# Altium PCB TS1A(EE19)9-7.PcbDoc
Units mm, origin at the board's own origin, x right, y up, seen from the top; angles counter-clockwise.
Board outline 57.72 x 30.96 mm, 2 copper layers (Top Layer, Bottom Layer); 33 components, 19 nets, 72 pads, 7 vias.
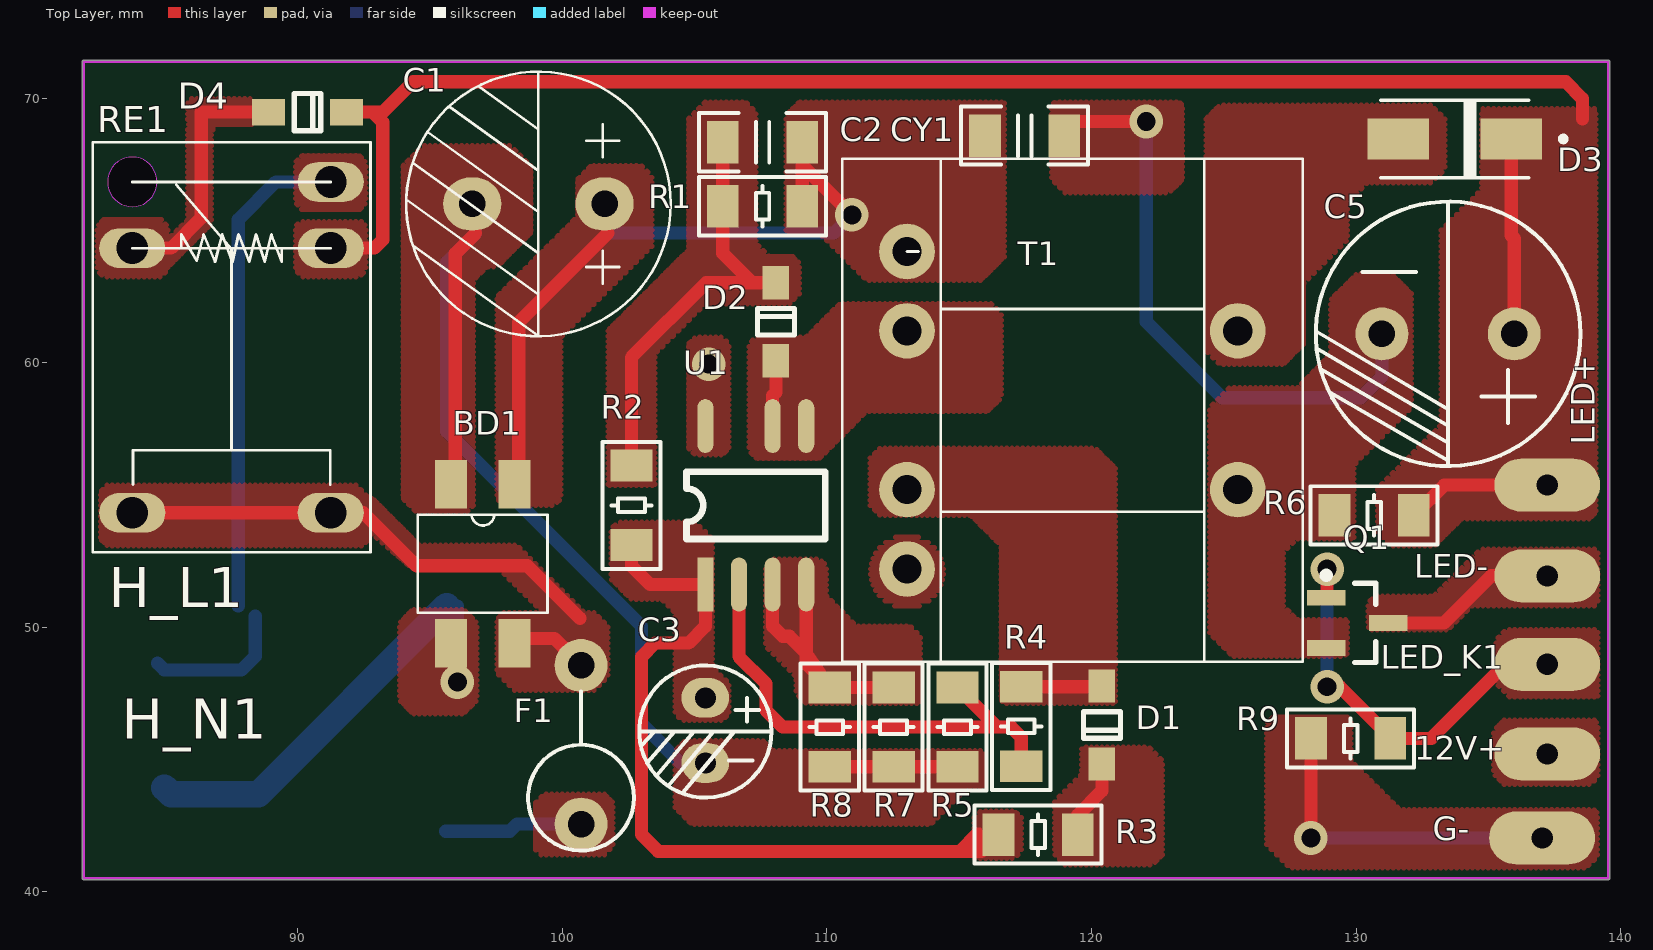
[diagram p0: Top Layer view]
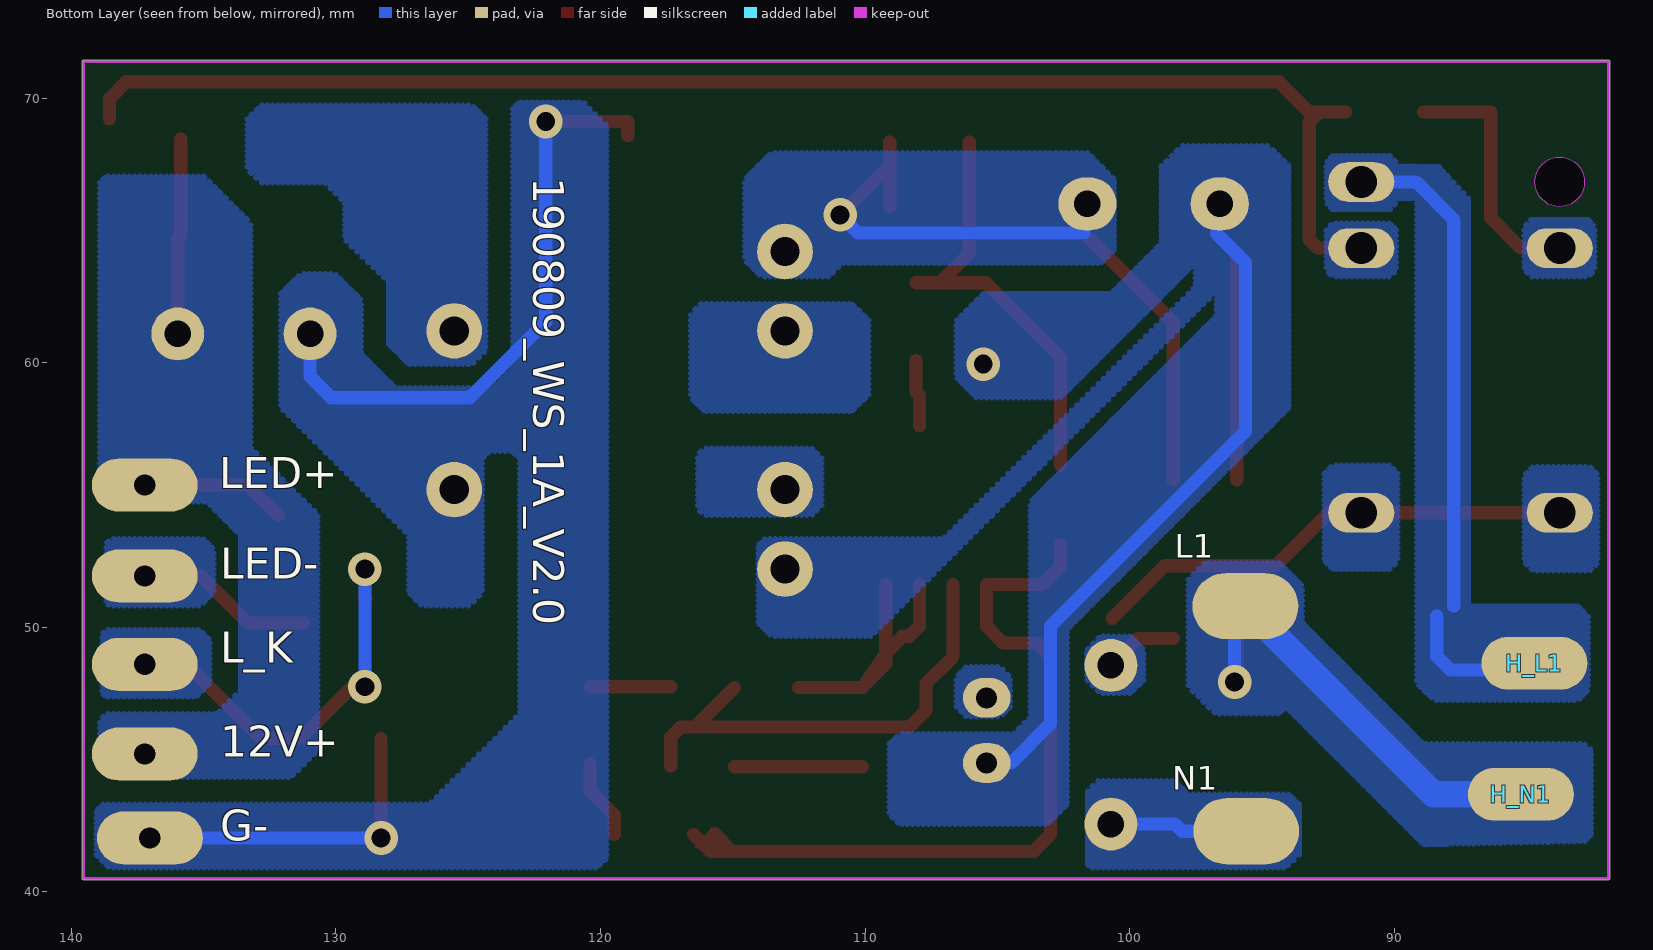
[diagram p1: Bottom Layer view, seen from below]

## Layer stack, top to bottom
Top Solder: solder mask 0.0102, Solder Resist, Dk 3.5
Top Layer: signal copper 0.0356
Dielectric 1: dielectric 0.32, FR-4, Dk 4.8
Bottom Layer: signal copper 0.0356
Bottom Solder: solder mask 0.0102, Solder Resist, Dk 3.5

## Board outline
81.865,40.513 ccw(c81.915,40.513) 81.915,40.463 139.533,40.463 ccw(c139.533,40.513) 139.583,40.513 139.583,71.374 ccw(c139.533,71.374) 139.533,71.424 81.915,71.424 ccw(c81.915,71.374) 81.865,71.374

## Design rules (kind name [scope] priority, off if disabled: settings)
Clearance [All] p1: gap=0.254 ignorepadtopadclearanceinfootprint=FALSE except(0: Arc-Hole Track-Hole SMDPad-Hole THPad-Hole Via-Hole Fill-Hole Poly-Hole Region-Hole Text-Hole)
PolygonConnect [All] p1: connectstyle=Direct reliefconductorwidth=0.254 reliefentries=4 polygonreliefangle="90 Angle" airgapwidth=0.254
RoutingVias [All] p1: holewidth=0.711 width=1.27 viastyle="Through Hole" minholewidth=0.711 minwidth=1.27 maxholewidth=0.711 maxwidth=1.27
SolderMaskExpansion [All] p1: expansion=0.102
Width [All] p1: maxlimit=1 minlimit=0.5 preferedwidth=0.5
30 further rules are at their usual default settings.

## Components (designator, comment, footprint, x,y, rotation, side; value= is the part's Value field where it differs from the comment)
12V+ "NC" PAD#1 136.826,45.212 r180 top
BD1 "MB10S/SOP-4" MBL10S 97,52.4 r180 top
C1 "10uF/400V" "400V/10uF 直插电解电容" 101.6,66 r180 top value=?
C2 "1nF/1206/1kV/10%" C1206 107.569,68.326 r0 top value=?
C3 "10uF/50V" 50V/10uF 105.41,46.101 r0 top value=?
C5 "1000uF/16V" 16V/1000uF 133.477,61.087 r180 top value=?
CY1 "1nF/1206/1kV/10%" C1206 117.475,68.58 r0 top value=?
D1 "FR107/SOD-123" SOD123 120.396,47.781 r90 top
D2 "FR107/SOD-123" SOD123 108.077,60.071 r270 top
D3 "SS310/SMA" SMA 133.731,68.453 r180 top
D4 "FR107" SOD123 88.9,69.469 r180 top
F1 "保险丝3A/250V" FUSE 100.711,46.061 r90 top
G- "NC" PAD#1 136.633,42.037 r180 top
H_L1 "Welding-hole" PAD#2 84.709,48.641 r180 top
H_N1 "Welding-hole" PAD#2 85.217,43.688 r180 top
L1 "NC" PAD#3 95.631,50.8 r0 bottom
LED+ "NC" PAD#1 136.826,55.372 r180 bottom
LED- "NC" PAD#1 136.826,51.943 r180 bottom
LED_K1 "NC" PAD#4 136.826,48.6 r0 top
N1 "NC" PAD#3 95.6,42.291 r180 bottom
Q1 "AO3400" SOT_23_N-MOS 130.048,50.165 r270 top
R1 "120K/1206/5%" R1206 107.569,65.913 r0 top value=1K
R2 "6.8M/1206/5%" R1206 102.616,54.61 r90 top value=1K
R3 "10R/1206/5%" R1206 117.983,42.164 r0 top value=1K
R4 "20K/1206/1%" R1206 117.348,46.252 r90 top value=1K
R5 "2.1K/1206/1%" R1206 114.935,46.228 r90 top value=1K
R6 "5.1K/1206/5%" R1206 130.683,54.229 r0 top value=1K
R7 "1.8R/1206/5%" R1206 112.522,46.228 r270 top value=1K
R8 "1.8R/1206/5%" R1206 110.109,46.228 r270 top value=1K
R9 "10K/1206/5%" R1206 129.794,45.8 r180 top value=1K
RE1 "RELAY-BSZ6-SS-112L" HKE_HRS1_DC12v 87.503,60.579 r90 top locked
T1 "TRANS" TRANS(EE19) 113.03,64.2 r0 top
U1 "LY2337/SOP-7" SOP-7 107.315,54.61 r90 top

## Footprints (in the part's own frame and the unit in brackets; to place one, negate y for a bottom-side part, rotate by r counter-clockwise, add the part's x,y. Pads: shape width x height; smd on the part's side, far side on the other; paste and mask are expansions set on the pad)
16V/1000uF [mm]
  round 2 hole 1: 1(-2.5,0) 2(2.5,0)
  silkscreen extent -5,-5 5,5
50V/10uF [mm]
  oval 1.8x1.5 hole 0.8: 1(0,1.232) 2(0,-1.232)
  silkscreen extent -2.5,-2.54 2.5,2.46
"400V/10uF 直插电解电容" [mm]
  oval 2.2x2 hole 1: 1(0,0) 2(5,0)
  silkscreen extent -2.5,-5 7.5,5
C1206 [mm]
  rect 1.2x1.6 smd: 1(-1.5,0) 2(1.5,0)
  silkscreen extent -2.4,-1.1 2.4,1.1
FUSE [mm]
  round 2 hole 1: 1(-3.5,0) 2(2.5,0)
  silkscreen extent -4.5,-2 1.51,2
HKE_HRS1_DC12v [mm]
  oval 1.5x2.5 hole 1.2: 1(-6.25,-3.75) 2(3.75,-3.75) 3(6.25,-3.75) 5(3.75,3.75) 6(-6.25,3.75)
  Keep-Out Layer board cut-out: 5.314,3.747 5.386,3.389 5.588,3.085 5.892,2.882 6.25,2.811 6.25,2.811 6.608,2.882 6.912,3.085 7.114,3.389 7.186,3.747 7.186,3.747 7.114,4.105 6.912,4.408 6.608,4.611 6.25,4.682 6.25,4.682 5.892,4.611 5.588,4.408 5.386,4.105 5.314,3.747
  silkscreen extent -7.75,-5.25 7.75,5.25
MBL10S [mm]
  rect 1.2x1.84 smd: 1(-1.2,-3) 2(-1.2,3) 3(1.2,-3) 4(1.2,3)
  silkscreen extent -2.44,-1.85 2.46,1.85
PAD#1 [mm]
  oval 4x2 hole 0.8: 1(-0.4,0)
PAD#2 [mm]
  oval 4x2 smd far side: 1(0,0)
PAD#3 [mm]
  oval 4x2.5 smd: 1(0,0)
PAD#4 [mm]
  oval 4x2 hole 0.8: 1(0.4,0)
R1206 [mm]
  rect 1.2x1.6 smd: 1(-1.5,0) 2(1.5,0)
  silkscreen extent -2.4,-1.1 2.4,1.1
SMA [mm]
  rect 2.33x1.55 smd: 1(2.135,0) 2(-2.135,0)
  silkscreen extent -4.2,-1.5 2.8,1.46
SOD123 [mm]
  rect 1.25x1 smd: 1(0,0) 2(-2.95,0)
  silkscreen extent -1.97,-0.7 -0.97,0.7, body extent -3.37,-0.85 0.38,0.85, height 1.2
SOP-7 [mil]
  rect 80x24 smd: 1(-117.87,75)
  oval 80x24 smd: 2(-117.87,25) 3(-117.87,-25) 4(-117.87,-75) 5(117.87,-75) 6(117.87,-25) 7(117.87,75)
  silkscreen extent -50,-103 50,103, body extent -118,-96 118,96, height 67
SOT_23_N-MOS [mm]
  rect 0.6x1.45 smd: 1(0,1.175) 2(-0.95,-1.175) 3(0.95,-1.175)
  silkscreen extent -1.92,-1.3 1.5,0.7, body extent -1.5,-0.7 1.5,0.7, height 1.1
TRANS(EE19) [mm]
  round 2.1 hole 1.1: 1(0,0) 2(0,-3) 3(0,-9) 4(0,-12) 5(12.5,-9) 6(12.5,-3)
  silkscreen extent -2.45,-15.5 14.95,3.5

## Part data
12V+ G- L1 LED+ LED- LED_K1 N1: library part Welding-hole, "焊接点"
BD1: library part Bridge2, "整流桥 MB10S/SOP-4", LatestRevisionDate=17-Jul-2002, LatestRevisionNote="Re-released for DXP Platform.", PackageDescription="Bridge Rectifier; 4 Terminals; Body 16.8 x 16.8 mm (typ); Pitch 10.67 mm", PackageReference=D-46_6A, Published=24-Mar-1999, Publisher="Altium Limited"
C1: library part "Cap Pol1", "直插电解电容10uF/400V", LatestRevisionDate=17-Jul-2002, LatestRevisionNote="Re-released for DXP Platform.", PackageDescription="Polarized Capacitor (Radial); 2 Leads", PackageReference=RB7.6-15, Published=8-Jun-2000, Publisher="Altium Limited"
C2 CY1: library part Cap, "1nF/1206/50V/10%", LatestRevisionDate=17-Jul-2002, LatestRevisionNote="Re-released for DXP Platform.", PackageDescription="Radial Cap, Thru-Hole; 2 Leads; 0.3 in Pin Spacing", PackageReference=RAD-0.3, Published=8-Jun-2000, Publisher="Altium Limited"
C3: library part "Cap Pol1", "直插电解电容10uF/50V", LatestRevisionDate=17-Jul-2002, LatestRevisionNote="Re-released for DXP Platform.", PackageDescription="Polarized Capacitor (Radial); 2 Leads", PackageReference=RB7.6-15, Published=8-Jun-2000, Publisher="Altium Limited"
C5: library part "Cap Pol1", "直插电解电容1000uF/16V", LatestRevisionDate=17-Jul-2002, LatestRevisionNote="Re-released for DXP Platform.", PackageDescription="Polarized Capacitor (Radial); 2 Leads", PackageReference=RB7.6-15, Published=8-Jun-2000, Publisher="Altium Limited"
D1 D2: library part Diode, "快恢复二极管 FR107 封装SOD-123", Code_JEDEC=DO-214-AB, LatestRevisionDate=17-Jul-2002, LatestRevisionNote="Re-released for DXP Platform.", PackageDescription="DO-214-AB/SMC; 2 C-Bend Leads; Body 7.9 x 5.9 mm, inc. leads (LxW)", PackageReference=SMC, PackageVersion=Sep-1996, Published=8-Jun-2000, Publisher="Altium Limited"
D3: library part Diode, "肖特基二极管 SS310/封装 SMA", Code_JEDEC=DO-214-AB, LatestRevisionDate=17-Jul-2002, LatestRevisionNote="Re-released for DXP Platform.", PackageDescription="DO-214-AB/SMC; 2 C-Bend Leads; Body 7.9 x 5.9 mm, inc. leads (LxW)", PackageReference=SMC, PackageVersion=Sep-1996, Published=8-Jun-2000, Publisher="Altium Limited"
D4: library part Diode, "Default Diode", Code_JEDEC=DO-214-AB, LatestRevisionDate=17-Jul-2002, LatestRevisionNote="Re-released for DXP Platform.", PackageDescription="DO-214-AB/SMC; 2 C-Bend Leads; Body 7.9 x 5.9 mm, inc. leads (LxW)", PackageReference=SMC, PackageVersion=Sep-1996, Published=8-Jun-2000, Publisher="Altium Limited"
F1: library part "Fuse 1", LatestRevisionDate=17-Jul-2002, LatestRevisionNote="Re-released for DXP Platform.", PackageDescription="Thru-Hole; 2 Leads", PackageReference=PIN-W2/E2.8, Published=8-Jun-2000, Publisher="Altium Limited"
H_L1 H_N1: "焊接点"
Q1: library part MOSFET-N, "N-MOS管 AO3400/SOT23", LatestRevisionDate=17-Jul-2002, LatestRevisionNote="Re-released for DXP Platform.", PackageDescription="TO, Flat Index; 3 In-Line, Axial Leads; Body Dia. 4.6mm; Lead Dia. 0.5 mm (max)", PackageReference=E3, PackageVersion=1995/1996, Published=8-Jun-2000, Publisher="Altium Limited"
R1: library part Res2, "Resistor 120K/1206/5%", LatestRevisionDate=17-Jul-2002, LatestRevisionNote="Re-released for DXP Platform.", PackageDescription="Axial Device, Thru-Hole; 2 Leads; 0.4 in Pin Spacing", PackageReference=AXIAL-0.4, Published=8-Jun-2000, Publisher="Altium Limited"
R2: library part Res2, "Resistor 6.8M/1206/5%  6.8兆欧姆", LatestRevisionDate=17-Jul-2002, LatestRevisionNote="Re-released for DXP Platform.", PackageDescription="Axial Device, Thru-Hole; 2 Leads; 0.4 in Pin Spacing", PackageReference=AXIAL-0.4, Published=8-Jun-2000, Publisher="Altium Limited"
R3: library part Res2, "Resistor 10R/1206/5%", LatestRevisionDate=17-Jul-2002, LatestRevisionNote="Re-released for DXP Platform.", PackageDescription="Axial Device, Thru-Hole; 2 Leads; 0.4 in Pin Spacing", PackageReference=AXIAL-0.4, Published=8-Jun-2000, Publisher="Altium Limited"
R4: library part Res2, "Resistor 20K/1206/1%", LatestRevisionDate=17-Jul-2002, LatestRevisionNote="Re-released for DXP Platform.", PackageDescription="Axial Device, Thru-Hole; 2 Leads; 0.4 in Pin Spacing", PackageReference=AXIAL-0.4, Published=8-Jun-2000, Publisher="Altium Limited"
R5: library part Res2, "Resistor 2.1K/1206/1%", LatestRevisionDate=17-Jul-2002, LatestRevisionNote="Re-released for DXP Platform.", PackageDescription="Axial Device, Thru-Hole; 2 Leads; 0.4 in Pin Spacing", PackageReference=AXIAL-0.4, Published=8-Jun-2000, Publisher="Altium Limited"
R6: library part Res2, "Resistor 5.1K/1206/5%", LatestRevisionDate=17-Jul-2002, LatestRevisionNote="Re-released for DXP Platform.", PackageDescription="Axial Device, Thru-Hole; 2 Leads; 0.4 in Pin Spacing", PackageReference=AXIAL-0.4, Published=8-Jun-2000, Publisher="Altium Limited"
R7 R8: library part Res2, "Resistor 2R/1206/5%", LatestRevisionDate=17-Jul-2002, LatestRevisionNote="Re-released for DXP Platform.", PackageDescription="Axial Device, Thru-Hole; 2 Leads; 0.4 in Pin Spacing", PackageReference=AXIAL-0.4, Published=8-Jun-2000, Publisher="Altium Limited"
R9: library part Res2, "Resistor 10K/1206/5%", LatestRevisionDate=17-Jul-2002, LatestRevisionNote="Re-released for DXP Platform.", PackageDescription="Axial Device, Thru-Hole; 2 Leads; 0.4 in Pin Spacing", PackageReference=AXIAL-0.4, Published=8-Jun-2000, Publisher="Altium Limited"
RE1: library part RELAY-6P, "RELAY-6P"
T1: "变压器"
U1: library part Component_1

## Via types
v1: diameter 1.27, hole 0.711, Top Layer to Bottom Layer, 7 vias

## Nets (pads, with @x,y where several pads share a name; then routed paths per layer and width w, separated by ;. In a path a pad name is that pad's centre, name@x,y a point inside that pad or via, vN(x,y) a via of type N, cw(c..) or ccw(c..) an arc to the next point about the centre after c; other vN are vias at no path point)
12V: 12V+.1 C5.1 D3.2 D4.2 LED+.1 R6.2 RE1.2 | length 68.2
  Top Layer w0.5: D4.2 92.837,69.469 ; RE1.2@91.888,64.329 92.904,64.329 93.218,64.643 93.218,69.088 92.837,69.469 ; R6.2 133.326,55.372 LED+.1 ; D3.2 135.866,64.805 135.977,64.694 C5.1 ; 138.557,69.203 138.557,69.977 137.922,70.612 94.361,70.612 93.218,69.469 92.837,69.469
  Bottom Layer w0.5: RE1.2 RE1.2@91.888,64.329
AGND: BD1.3 C1.2 C3.2 R5.1 R7.2 R8.2 T1.4 U1.7 | length 39.5
  Top Layer w0.5: BD1.3@95.955,55.578 95.955,64.125 96.727,64.897 ; R8.2 R7.2 R5.1
  Bottom Layer w0.5: 96.727,64.897 95.631,63.801 95.631,57.404 102.997,50.038 102.997,46.355 104.483,44.869 C3.2
  other v1: 105.537,59.944
GND: C5.2 CY1.2 G-.1 Q1.3 R6.1 R9.2 T1.5 | length 35.7
  Top Layer w0.5: CY1.2 118.975,69.113 v1(122.072,69.113) ; v1(128.294,42.037) R9.2
  Bottom Layer w0.5: v1(122.072,69.113) 122.072,61.544 124.943,58.674 130.175,58.674 130.977,59.476 C5.2 ; v1(128.294,42.037) G-.1
NetBD1_1: BD1.1 C1.1 C2.2 CY1.1 R1.2 T1.1 | length 25.3
  Top Layer w0.5: BD1.1@98.355,55.578 98.355,61.525 101.727,64.897 ; R1.2 109.069,67.461 ; C2.2 109.069,67.461 ; v1(110.947,65.583) 109.069,67.461
  Bottom Layer w0.5: 101.727,64.897 110.261,64.897 v1(110.947,65.583)
NetC2_1: C2.1 D2.2 R1.1 R2.2 | length 16.5
  Top Layer w0.5: R2.2 102.616,60.198 105.439,63.021 107.183,63.021 ; C2.1 R1.1 106.069,64.135 107.183,63.021 ; D2.2 107.183,63.021
NetC3_1: C3.1 R2.1 R3.1 U1.1 | length 29.1
  Top Layer w0.5: R2.1 102.616,52.324 103.324,51.616 U1.1 105.41,50.038 104.775,49.403 103.505,49.403 102.997,48.895 102.997,42.164 103.632,41.529 115.848,41.529 R3.1
NetD1_1: D1.1 R4.2 T1.3 | length 3.1
  Top Layer w0.5: R4.2 120.367,47.752 D1.1
NetD1_2: D1.2 R3.2 | length 3
  Top Layer w0.5: R3.2 119.483,42.902 120.396,43.815 D1.2
NetD2_1: D2.1 T1.2 U1.5 U1.6 | length 2.5
  Top Layer w0.5: U1.6 107.95,58.75 108.077,58.877 D2.1
NetD3_1: D3.1 T1.6
NetD4_1: D4.1 RE1.5 | length 9.6
  Top Layer w0.5: RE1.5 85.219,64.329 86.36,65.47 86.36,69.469 D4.1
NetF1_1: F1.1 N1.1 | length 5.2
  Bottom Layer w0.5: N1.1 98.019,42.291 98.289,42.561 F1.1
NetH_L1_1: H_L1.1 RE1.3 | length 24.2
  Bottom Layer w0.5: H_L1.1 84.963,48.387 87.884,48.387 88.4,48.903 88.4,50.419 ; 87.757,50.8 87.757,65.405 89.181,66.829 RE1.3
NetLED-_1: LED-.1 Q1.1 | length 6.7
  Top Layer w0.5: Q1.1 133.325,50.165 135.103,51.943 LED-.1
NetLED_K1_1: LED_K1.1 Q1.2 R9.1 | length 15.9
  Top Layer w0.5: Q1.2 128.905,51.115 v1(128.905,52.197) ; v1(128.905,47.752) 129.39,47.752 131.294,45.848 R9.1 132.842,45.8 135.642,48.6 LED_K1.1
  Bottom Layer w0.5: v1(128.905,47.752) v1(128.905,52.197)
NetR4_1: R4.1 R5.2 U1.2 | length 18.5
  Top Layer w0.5: U1.2 106.68,48.895 107.696,47.879 107.696,46.863 108.331,46.228 116.435,46.228 ; R5.2 116.435,46.228 ; R4.1 117.348,45.847 116.967,46.228 116.435,46.228
NetR7_1: R7.1 R8.1 U1.3 U1.4 | length 11.5
  Top Layer w0.5: U1.3 107.95,50.038 108.331,49.657 108.585,49.657 109.22,49.022 ; U1.4 109.22,49.022 ; R7.1 R8.1 ; 109.22,49.022 R8.1 ; 109.22,49.022 109.22,48.617 R8.1
~220L: BD1.4 H_N1.1 L1.1 | length 18.7
  Top Layer w0.5: BD1.4@95.955,49.578 95.955,48.012 v1(96.037,47.93)
  Bottom Layer w0.5: L1.1 96.037,50.8 v1(96.037,47.93)
  Bottom Layer w1: H_N1.1@84.963,43.942 H_N1.1 88.519,43.688 L1.1
~220N: BD1.2 F1.2 RE1.1 RE1.6 | length 21.3
  Top Layer w0.5: RE1.6 RE1.1 92.483,54.329 94.488,52.324 98.679,52.324 100.667,50.336 ; BD1.2@98.355,49.578 99.694,49.578 F1.2

## Polygon pours and split planes (outlines as drawn)
~220N on Top Layer "~220N_L01_P171" (hatched 90Degree grid 0.2 track 0.2, remove dead copper, pour order 171): 82.55,55.118 82.55,53.34 82.804,53.086 92.456,53.086 92.71,53.34 92.71,54.864 92.202,55.372 82.804,55.372
~220L on Top Layer "NONET_L01_P-001" (hatched 90Degree grid 0.2 track 0.2, remove dead copper, pour order 4): 93.853,50.165 93.853,47.244 94.361,46.736 96.266,46.736 96.774,47.244 96.774,50.165 96.266,50.673 94.361,50.673
no net on Top Layer "NONET_L01_P-001" (hatched 90Degree grid 0.2 track 0.2, remove dead copper, pour order 0): 93.599,50.927
no net on Top Layer "NONET_L01_P-001" (hatched 90Degree grid 0.2 track 0.2, remove dead copper, pour order 2): 96.266,51.054
~220N on Top Layer "NONET_L01_P-001" (hatched 90Degree grid 0.2 track 0.2, remove dead copper, pour order 10): 98.171,47.625 101.219,47.625 101.727,48.133 101.727,50.038 101.219,50.546 97.79,50.546 97.536,50.292 97.536,48.26
NetF1_1 on Top Layer "NONET_L01_P-001" (hatched 90Degree grid 0.2 track 0.2, remove dead copper, pour order 16): 98.99,43.364 98.99,41.599 99.187,41.402 101.6,41.402 101.911,41.713 101.911,43.377 101.6,43.688 99.314,43.688
NetBD1_1 on Top Layer "NONET_L01_P-001" (hatched 90Degree grid 0.2 track 0.2, remove dead copper, pour order 20): 99.949,54.864 99.949,60.96 102.743,63.754 103.378,64.389 103.378,67.056 102.997,67.437 102.489,67.437 101.092,67.437 100.584,66.929 100.584,65.532 97.536,62.484 97.536,54.864 97.79,54.61 99.695,54.61
AGND on Top Layer "NONET_L01_P-001" (hatched 90Degree grid 0.2 track 0.2, remove dead copper, pour order 28): 106.299,56.769 106.299,60.706 106.045,60.96 105.029,60.96 104.775,60.706 104.775,56.769 105.029,56.515 106.045,56.515
NetC3_1 on Top Layer "NONET_L01_P-001" (hatched 90Degree grid 0.2 track 0.2, remove dead copper, pour order 34): 102.108,53.975 105.029,53.975 105.664,53.34 105.664,48.514 105.918,48.26 106.299,47.879 106.299,46.736 106.045,46.482 104.521,46.482 104.267,46.736 104.267,50.546 103.759,51.054 102.616,51.054 101.854,51.816 101.854,53.721
AGND on Top Layer "NONET_L01_P-001" (hatched 90Degree grid 0.2 track 0.2, remove dead copper, pour order 36): 104.902,42.545 113.919,42.545 114.554,43.18 115.316,43.942 115.951,43.942 115.951,45.339 107.95,45.339 107.569,45.72 104.648,45.72 104.267,45.339 104.267,43.18
NetR7_1 on Top Layer "NONET_L01_P-001" (hatched 90Degree grid 0.2 track 0.2, remove dead copper, pour order 38): 107.95,52.578 109.728,52.578 109.982,52.324 109.982,51.181 111.125,50.038 113.157,50.038 113.538,49.657 113.538,47.117 109.22,47.117 108.839,47.498 108.839,48.133 107.696,49.276 107.696,52.324
NetD1_2 on Top Layer "NONET_L01_P-001" (hatched 90Degree grid 0.2 track 0.2, remove dead copper, pour order 44): 119.634,45.466 122.174,45.466 122.682,44.958 122.682,41.402 122.301,41.021 118.999,41.021 118.618,41.402 118.618,43.434 119.634,44.45
NetC3_1 on Top Layer "NONET_L01_P-001" (hatched 90Degree grid 0.2 track 0.2, remove dead copper, pour order 76): 115.57,41.275 117.094,41.275 117.348,41.529 117.348,42.799 117.094,43.053 115.824,43.053 115.57,42.799
NetD3_1 on Top Layer "NONET_L01_P-001" (hatched 90Degree grid 0.2 track 0.2, remove dead copper, pour order 88): 132.842,69.723 124.841,69.723 124.333,69.215 124.333,60.452 124.841,59.944 127.254,59.944 128.016,60.706 128.016,62.992 129.667,64.643 129.667,66.04 130.429,66.802 132.842,66.802 133.35,67.31 133.35,69.215
GND on Top Layer "NONET_L01_P-001" (hatched 90Degree grid 0.2 track 0.2, remove dead copper, pour order 94): 118.618,69.85 123.317,69.85 123.444,69.723 123.444,66.929 122.936,66.421 118.999,66.421 118.491,66.929 118.491,69.723
12V on Top Layer "NONET_L01_P-001" (hatched 90Degree grid 0.2 track 0.2, remove dead copper, pour order 126): 135.588,44.069 138.876,44.069 139.271,44.464 139.271,46.214 139.003,46.482 135.588,46.482 135.207,46.101 135.207,44.45
GND on Top Layer "NONET_L01_P-001" (hatched 90Degree grid 0.2 track 0.2, remove dead copper, pour order 128): 135.179,40.821 138.608,40.821 139.116,41.329 139.116,42.98 138.987,43.108 134.8,43.108 134.671,42.98 134.671,41.329
NetC2_1 on Top Layer "NONET_L01_P-001" (hatched 90Degree grid 0.2 track 0.2, remove dead copper, pour order 132): 101.727,55.372 103.505,55.372 103.505,60.325 105.41,62.23 108.585,62.23 108.966,62.611 108.966,63.754 108.712,64.008 107.823,64.008 107.315,64.516 107.315,69.469 106.934,69.85 105.41,69.85 104.775,69.215 104.775,64.262 101.727,61.214
GND on Top Layer "NONET_L01_P-001" (hatched 90Degree grid 0.2 track 0.2, remove dead copper, pour order 134): 138.2,43.108 131.644,43.108 129.794,44.958 129.794,46.482 129.667,46.609 126.873,46.609 126.629,46.365 126.629,41.773 127.581,40.821 138.2,40.821
NetLED_K1_1 on Top Layer "NONET_L01_P-001" (hatched 90Degree grid 0.2 track 0.2, remove dead copper, pour order 120): 135.804,47.371 139.233,47.371 139.36,47.498 139.36,49.911 135.677,49.911 135.296,49.53 135.296,47.879
12V on Top Layer "NONET_L01_P-001" (hatched 90Degree grid 0.2 track 0.2, remove dead copper, pour order 136): 134.747,69.596 134.747,66.548 133.223,65.024 133.223,57.658 131.953,56.388 130.81,55.245 130.81,54.102 130.81,53.594 131.318,53.086 132.969,53.086 133.477,53.594 133.985,54.102 138.811,54.102 139.065,54.356 139.065,58.42 139.065,69.596 138.684,69.596
GND on Top Layer "NONET_L01_P-001" (hatched 90Degree grid 0.2 track 0.2, remove dead copper, pour order 138): 132.08,62.611 132.08,58.293 129.921,56.134 129.921,53.34 127.762,53.34 127.254,52.832 127.254,50.8 127.762,50.292 129.667,50.292 129.667,49.022 129.54,48.895 125.349,48.895 124.46,49.784 124.46,58.293 125.222,59.055 127.804,59.055 129.032,60.325 129.032,62.357 130.048,63.373 131.318,63.373
NetLED-_1 on Top Layer "NONET_L01_P-001" (hatched 90Degree grid 0.2 track 0.2, remove dead copper, pour order 140): 130.462,50.927 130.462,50.005 130.556,49.911 133.477,49.911 134.366,50.8 139.319,50.8 139.319,52.959 134.714,52.959 132.936,51.181 130.716,51.181
NetBD1_1 on Top Layer "NONET_L01_P-001" (hatched 90Degree grid 0.2 track 0.2, remove dead copper, pour order 144): 108.458,64.897 109.728,64.897 111.506,63.119 115.824,63.119 116.713,64.008 116.713,69.85 108.966,69.85 108.458,69.342
NetD2_1 on Top Layer "NONET_L01_P-001" (hatched 90Degree grid 0.2 track 0.2, remove dead copper, pour order 146): 110.109,56.769 111.506,58.166 116.078,58.166 116.586,58.674 116.586,61.849 116.205,62.23 110.49,62.23 109.982,61.722 109.22,60.96 107.315,60.96 107.061,60.706 107.061,56.67 107.343,56.388 109.728,56.388
NetD1_1 on Top Layer "NONET_L01_P-001" (hatched 90Degree grid 0.2 track 0.2, remove dead copper, pour order 150): 112.014,54.229 115.443,54.229 116.586,53.086 116.586,47.244 116.713,47.117 120.904,47.117 120.904,56.007 120.142,56.769 112.014,56.769 111.633,56.388 111.633,54.61
AGND on Top Layer "NONET_L01_P-001" (hatched Horizontal grid 0.2 track 0.2, remove dead copper, pour order 152): 111.656,52.093 ccw(c113.03,52.093) 113.03,50.719 ccw(c113.03,52.093) 114.404,52.093 ccw(c113.03,52.093) 113.03,53.467 ccw(c113.03,52.093)
~220N on Top Layer "~220N_L01_P177" (hatched 90Degree grid 0.2 track 0.2, remove dead copper, pour order 177): 92.578,54.869 92.832,54.869 94.864,52.837 94.864,52.4 94.361,52.197 92.578,53.726 92.578,54.078
~220N on Top Layer "~220N_L01_P179" (hatched 90Degree grid 0.2 track 0.2, remove dead copper, pour order 179): 94.6,53.101 98.283,53.101 98.425,52.959 98.425,52.451 98.374,52.4 94.815,52.4 94.6,52.615
~220N on Top Layer "~220N_L01_P181" (hatched 90Degree grid 0.2 track 0.2, remove dead copper, pour order 181): 97.663,52.324 97.663,52.156 99.4,50.419 100.819,50.565 100.182,51.202 98.361,53.023 97.6,52.4
NetD4_1 on Top Layer "NETD4_1_L01_P213" (hatched 90Degree grid 0.2 track 0.2, remove dead copper, pour order 213): 82.677,65.405 84.836,65.405 85.09,65.151 85.09,63.5 84.836,63.246 82.677,63.246 82.423,63.5 82.423,65.151
NetH_L1_1 on Top Layer "NETH_L1_1_L01_P217" (hatched 90Degree grid 0.2 track 0.2, remove dead copper, pour order 217): 90.17,67.818 92.329,67.818 92.583,67.564 92.583,66.04 92.329,65.786 90.17,65.786 89.916,66.04 89.916,67.564
NetD4_1 on Top Layer "NETD4_1_L01_P229" (hatched 90Degree grid 0.2 track 0.2, remove dead copper, pour order 229): 85.852,68.961 86.961,68.961 86.741,68.741 86.741,65.278 85.852,65.278
NetD4_1 on Top Layer "NETD4_1_L01_P231" (hatched 90Degree grid 0.2 track 0.2, remove dead copper, pour order 231): 86.741,65.278 86.741,65.251 85.09,63.6 85.09,64.643 86.138,65.691 86.552,65.278
AGND on Top Layer "NONET_L01_P-001" (hatched 90Degree grid 0.2 track 0.2, remove dead copper, pour order 18): 93.98,54.864 93.98,67.437 94.742,68.199 98.044,68.199 98.806,67.437 98.806,64.897 97.536,63.627 97.155,63.627 96.647,63.119 96.647,54.61 96.393,54.356 94.488,54.356
12V on Top Layer "12V_L01_P233" (hatched 90Degree grid 0.2 track 0.2, remove dead copper, pour order 233): 90.17,65.405 92.329,65.405 92.583,65.151 92.583,63.5 92.329,63.246 90.17,63.246 89.916,63.5 89.916,65.151
NetD4_1 on Top Layer "NETD4_1_L01_P227" (hatched 90Degree grid 0.2 track 0.2, remove dead copper, pour order 227): 88.265,69.977 85.852,69.977 85.852,68.961 85.891,69 88.265,69
no net on Bottom Layer "NONET_L01_P-001" (hatched 90Degree grid 0.2 track 0.2, remove dead copper, pour order 6): 93.599,47.879
NetF1_1 on Bottom Layer "NONET_L01_P-001" (hatched 90Degree grid 0.2 track 0.2, remove dead copper, pour order 12): 94.234,40.767 101.346,40.767 101.6,41.021 101.6,43.815 101.219,44.196 98.298,44.196 97.79,43.688 93.98,43.688 93.599,43.307 93.599,41.402
~220N on Bottom Layer "NONET_L01_P-001" (hatched 90Degree grid 0.2 track 0.2, remove dead copper, pour order 14): 101.114,47.498 99.971,47.498 99.463,48.006 99.463,49.149 99.971,49.657 101.114,49.657 101.622,49.149 101.622,48.006
~220L on Bottom Layer "NONET_L01_P-001" (hatched 90Degree grid 0.2 track 0.2, remove dead copper, pour order 84): 94.361,46.736 93.472,47.625 93.472,51.562 94.361,52.451 97.155,52.451 97.79,51.816 97.79,47.752 96.774,46.736
NetC3_1 on Bottom Layer "NONET_L01_P-001" (hatched 90Degree grid 0.2 track 0.2, remove dead copper, pour order 86): 104.902,46.609 106.172,46.609 106.553,46.99 106.553,48.133 106.172,48.514 104.902,48.514 104.521,48.133 104.521,46.99
AGND on Bottom Layer "NONET_L01_P-001" (hatched 90Degree grid 0.2 track 0.2, remove dead copper, pour order 32): 98.044,68.199 98.806,67.437 98.806,64.516 100.711,62.611 105.537,62.611 106.553,61.595 106.553,59.436 105.791,58.674 102.616,58.674 97.663,63.627 97.536,63.627 97.536,62.865 107.061,53.34 113.792,53.34 114.046,53.086 114.046,50.165 113.538,49.657 109.761,49.657 96.727,62.691 96.727,61.769 103.759,54.737 103.759,46.609 104.394,45.974 108.712,45.974 109.093,45.593 109.093,42.926 108.712,42.545 103.124,42.545 102.362,43.307 102.362,49.911 93.98,58.293 93.98,67.437 94.742,68.199
NetD3_1 on Bottom Layer "NONET_L01_P-001" (hatched 90Degree grid 0.2 track 0.2, remove dead copper, pour order 90): 132.842,69.723 124.841,69.723 124.333,69.215 124.333,60.452 124.841,59.944 124.968,59.944 127.254,59.944 128.016,60.706 128.016,63.036 129.667,64.643 129.667,66.04 130.429,66.802 132.842,66.802 133.35,67.31 133.35,69.215
NetBD1_1 on Bottom Layer "NONET_L01_P-001" (hatched 90Degree grid 0.2 track 0.2, remove dead copper, pour order 98): 100.584,64.77 100.584,66.929 101.6,67.945 113.538,67.945 114.554,66.929 114.554,63.881 113.919,63.246 111.379,63.246 110.871,63.754 101.092,63.754 100.584,64.262
GND on Bottom Layer "NONET_L01_P-001" (hatched 90Degree grid 0.2 track 0.2, remove dead copper, pour order 108): 123.063,69.85 120.65,69.85 119.761,68.961 119.761,41.275 120.269,40.767 138.43,40.767 139.065,41.402 139.065,43.053 138.811,43.307 126.492,43.307 123.063,46.736 123.063,56.388 123.317,56.642 124.206,56.642 124.46,56.388 124.46,51.308 124.968,50.8 126.746,50.8 127.254,51.308 127.254,53.467 132.08,58.293 132.08,62.611 131.318,63.373 130.048,63.373 129.032,62.357 129.032,60.325 127.762,59.055 124.079,59.055 123.317,59.817 123.317,69.596
12V on Bottom Layer "NONET_L01_P-001" (hatched 90Degree grid 0.2 track 0.2, remove dead copper, pour order 114): 133.223,65.278 133.223,55.499 133.985,54.737 138.557,54.737 138.938,55.118 138.938,58.547 138.938,66.802 138.684,67.056 135.001,67.056
NetLED_K1_1 on Bottom Layer "NONET_L01_P-001" (hatched 90Degree grid 0.2 track 0.2, remove dead copper, pour order 122): 135.274,47.371 138.703,47.371 138.83,47.498 138.83,49.759 138.678,49.911 135.147,49.911 134.766,49.53 134.766,47.879
NetLED-_1 on Bottom Layer "NONET_L01_P-001" (hatched 90Degree grid 0.2 track 0.2, remove dead copper, pour order 124): 135.131,50.8 138.56,50.8 138.687,50.927 138.687,53.172 138.518,53.34 135.004,53.34 134.623,52.959 134.623,51.308
12V on Bottom Layer "NONET_L01_P-001" (hatched 90Degree grid 0.2 track 0.2, remove dead copper, pour order 142): 133.223,56.8 130.683,54.26 130.683,45.339 131.699,44.323 138.557,44.323 138.938,44.704 138.938,46.482 138.684,46.736 134.493,46.736 133.604,47.625 133.604,53.467 135.001,54.864 133.223,56.642
NetD2_1 on Bottom Layer "NONET_L01_P-001" (hatched 90Degree grid 0.2 track 0.2, remove dead copper, pour order 148): 116.205,62.23 110.49,62.23 109.855,61.595 109.855,58.801 110.49,58.166 116.078,58.166 116.586,58.674 116.586,61.849
NetD1_1 on Bottom Layer "NONET_L01_P-001" (hatched 90Degree grid 0.2 track 0.2, remove dead copper, pour order 156): 111.633,56.388 111.633,54.61 112.014,54.229 116.078,54.229 116.332,54.483 116.332,56.515 116.078,56.769 112.014,56.769
NetH_L1_1 on Bottom Layer "NETH_L1_1_L02_P185" (hatched 90Degree grid 0.2 track 0.2, remove dead copper, pour order 185): 90.17,67.818 92.329,67.818 92.583,67.564 92.583,66.04 92.329,65.786 90.17,65.786 89.916,66.04 89.916,67.564
NetH_L1_1 on Bottom Layer "NETH_L1_1_L02_P187" (hatched 90Degree grid 0.2 track 0.2, remove dead copper, pour order 187): 89.916,67.4 89.879,67.437 88.298,67.4 88.265,66.167 88.298,66.2 90.043,66.2
NetH_L1_1 on Bottom Layer "NETH_L1_1_L02_P189" (hatched 90Degree grid 0.2 track 0.2, remove dead copper, pour order 189): 88.258,67.334 87.2,66.21 87.2,65.156 87.889,65.156 89.319,66.586
NetH_L1_1 on Bottom Layer "NETH_L1_1_L02_P191" (hatched 90Degree grid 0.2 track 0.2, remove dead copper, pour order 191): 87.2,65.786 87.2,50.419 89.154,50.419 89.154,66.059
NetH_L1_1 on Bottom Layer "NETH_L1_1_L02_P197" (hatched 90Degree grid 0.2 track 0.2, remove dead copper, pour order 197): 89.154,50.8 83.058,50.8 82.677,50.419 82.677,47.625 83.058,47.244 88.519,47.244 89.154,47.879
~220L on Bottom Layer "~220L_L02_P199" (hatched 90Degree grid 0.2 track 0.2, remove dead copper, pour order 199): 82.55,45.339 82.55,42.167 82.804,41.907 88.9,41.783 88.9,45.593 83.439,45.593 82.804,45.593
~220L on Bottom Layer "~220L_L02_P203" (hatched 90Degree grid 0.2 track 0.2, remove dead copper, pour order 203): 88.9,45.593 93.472,50.165 94.8,50.165 94.8,47.683 88.9,41.783
~220N on Bottom Layer "~220N_L02_P205" (hatched 90Degree grid 0.2 track 0.2, remove dead copper, pour order 205): 90.17,56.134 92.329,56.134 92.661,55.802 92.661,52.529 92.329,52.197 90.17,52.197 89.867,52.5 89.867,55.831
~220N on Bottom Layer "~220N_L02_P207" (hatched 90Degree grid 0.2 track 0.2, remove dead copper, pour order 207): 82.614,56.071 84.772,56.071 85.09,55.753 85.09,52.451 84.773,52.134 82.613,52.134 82.296,52.451 82.296,55.753
NetD4_1 on Bottom Layer "NETD4_1_L02_P209" (hatched 90Degree grid 0.2 track 0.2, remove dead copper, pour order 209): 82.677,65.405 84.836,65.405 85.09,65.151 85.09,63.5 84.836,63.246 82.677,63.246 82.423,63.5 82.423,65.151
12V on Bottom Layer "12V_L02_P237" (hatched 90Degree grid 0.2 track 0.2, remove dead copper, pour order 237): 90.17,65.278 92.329,65.278 92.583,65.024 92.583,63.5 92.329,63.246 90.17,63.246 89.916,63.5 89.916,65.024

## Keep-outs
Keep-Out Layer:
  lines w0.1: 95.881,71.374 96.743,71.374 ; 95.881,71.374 96.743,71.374 ; 95.881,71.374 96.743,71.374 ; 95.881,71.374 81.915,71.374 81.915,40.513 139.533,40.513 139.533,71.374 122.191,71.374 96.743,71.374

## Other copper
Top Layer:
  region net NetC3_1: 115.824,42.418 115.57,42.418 114.808,41.656 116.459,41.656

## Silkscreen, mask and mechanical layers (free items; w line width, h text height)
Top Overlay:
  text "LED+" at 139.319,56.896 h1.5 r90
  text "LED-" at 132.207,51.562 h1.5
Bottom Overlay:
  text "190809_WS_1A_V2.0" at 122.936,67 h2 r90
  text "L_K" at 134.366,48.26 h2
  text "12V+" at 134.366,44.704 h2
  text "G-" at 134.366,41.529 h2